# Altium PCB aducm355.PcbDoc
Units mil, origin at the board's own origin, x right, y up, seen from the top; angles counter-clockwise.
Board outline 1195 x 414.11 mil, 2 copper layers (Top Layer, Bottom Layer), stack 12.4 mil thick; 21 components, 24 nets, 164 pads, 27 vias.
Unrouted connection lines stored in the file: 1.
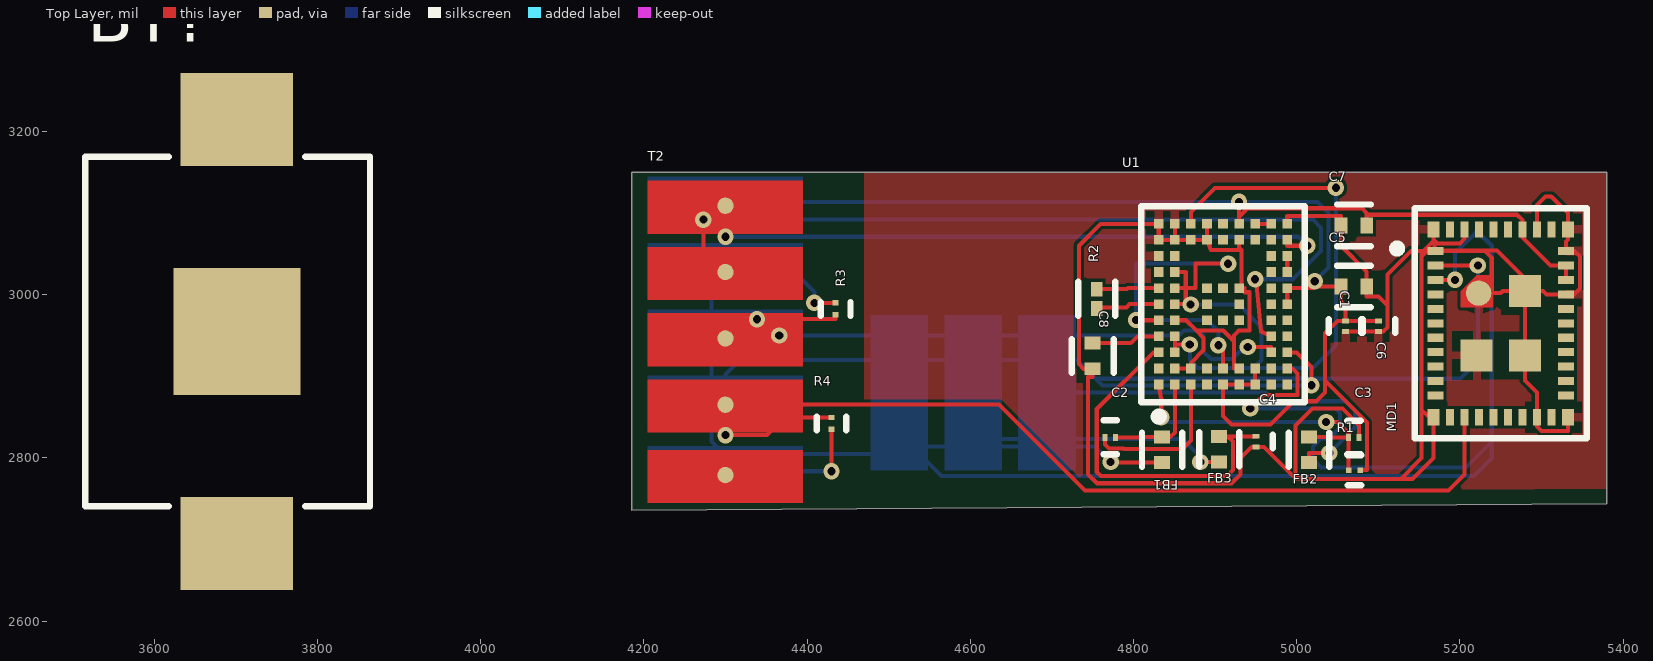
[diagram p0: Top Layer view]
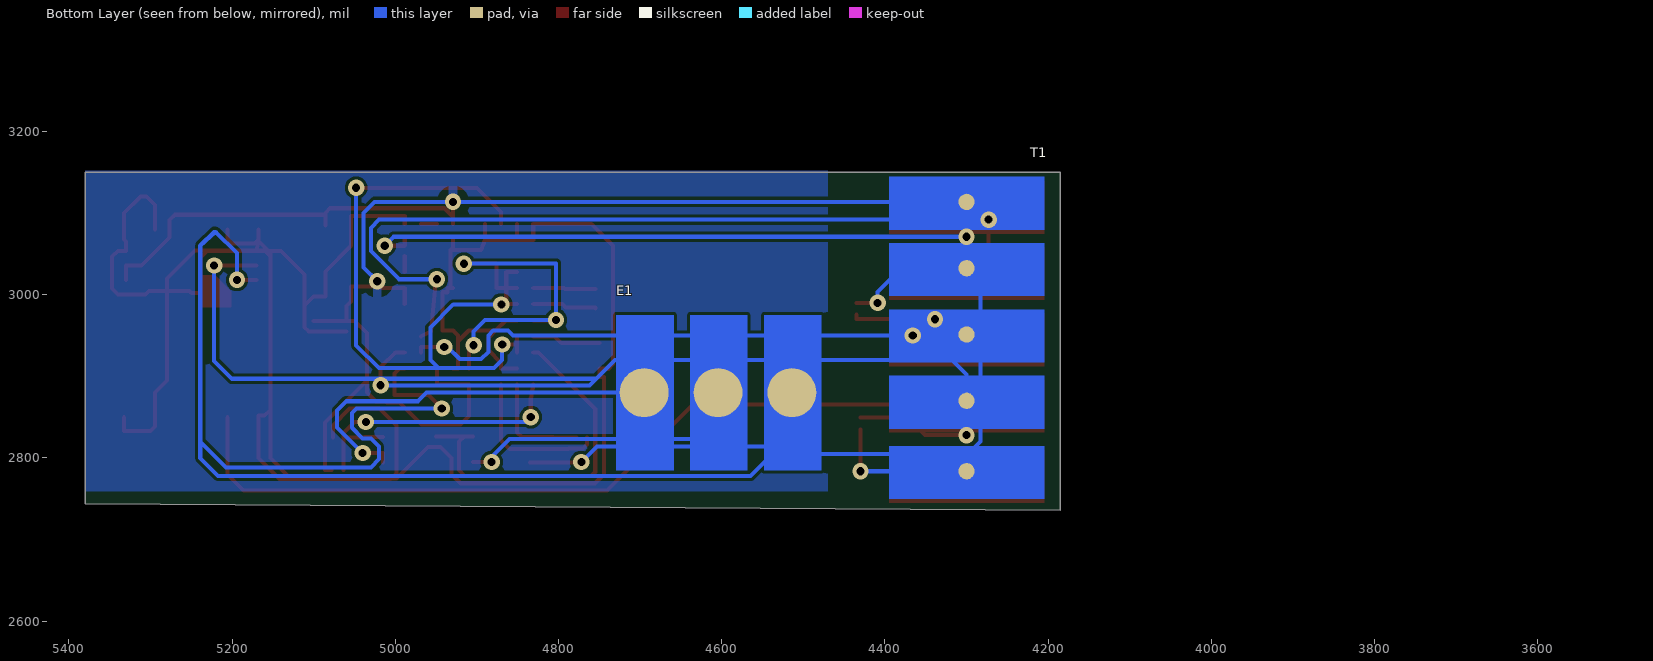
[diagram p1: Bottom Layer view, seen from below]
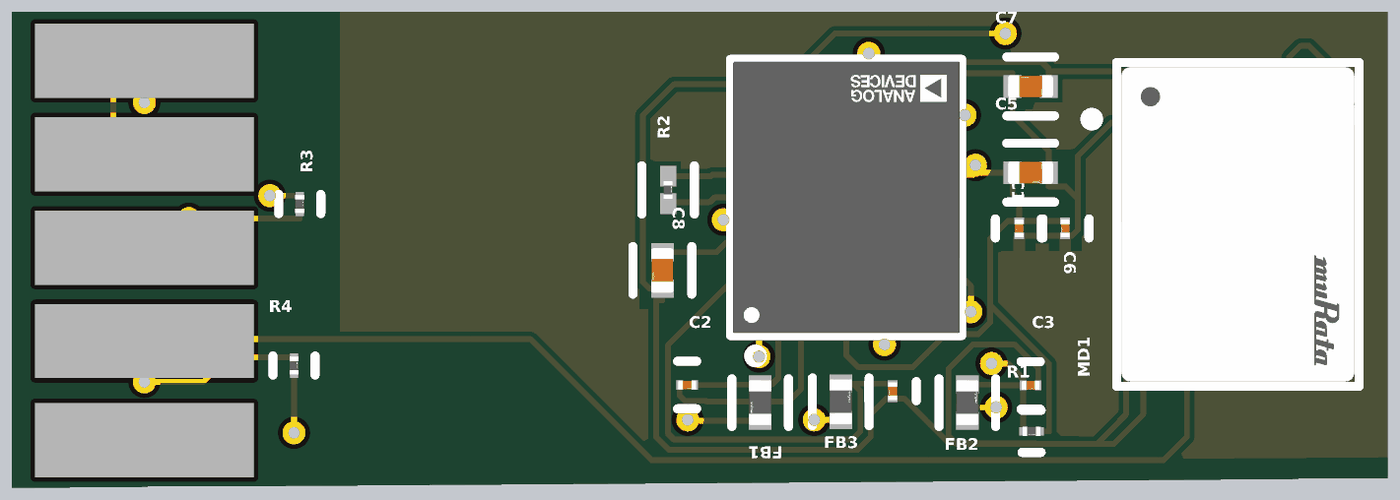
[diagram p2: 3D render of the assembled board from above, using the file's embedded part models]

## Layer stack, top to bottom
Top PI Coverlay: solder mask 0.4724, FC-001, Dk 4
Top Layer: signal copper 1.4
Adhesive 1: prepreg 2.8, PP-006, Dk 4.1
Dielectric 1: core 4, Core-009, Dk 4.5
Adhesive 2: prepreg 2.8, PP-006, Dk 4.1
Bottom Layer: signal copper 1.4
Bottom PI Coverlay: solder mask 0.4724, FC-001, Dk 4

## Board outline
4185,2735.89 4185,3150 5380,3150 5380,2744.08

## Design rules (kind name [scope] priority, off if disabled: settings)
Clearance [All] p1: gap=4 ignorepadtopadclearanceinfootprint=FALSE
FabricationTestpoint "Schematic Fabrication Testpoint Style_3" [InComponent('T1')] p1: side=2 testpointundercomponent=TRUE minsize=40 maxsize=100 preferedsize=60 minholesize=0 maxholesize=40 preferedholesize=32 testpointgrid=1 allowsidebottom=TRUE usegrid=TRUE gridtolerance=0.01
FabricationTestpoint "Schematic Fabrication Testpoint Style_1" [InComponent('T2')] p2: side=2 testpointundercomponent=TRUE minsize=40 maxsize=100 preferedsize=60 minholesize=0 maxholesize=40 preferedholesize=32 testpointgrid=1 allowsidebottom=TRUE usegrid=TRUE gridtolerance=0.01
FabricationTestpoint "Schematic Fabrication Testpoint Style" [InComponent('E1')] p3: side=2 testpointundercomponent=TRUE minsize=40 maxsize=100 preferedsize=60 minholesize=0 maxholesize=40 preferedholesize=32 testpointgrid=1 allowsidebottom=TRUE usegrid=TRUE gridtolerance=0.01
FabricationTestpoint [All] p4: side=3 testpointundercomponent=TRUE minsize=40 maxsize=100 preferedsize=60 minholesize=0 maxholesize=40 preferedholesize=32 testpointgrid=1 allowsidetop=TRUE allowsidebottom=TRUE usegrid=TRUE gridtolerance=0.01
HoleToHoleClearance [All] p1: gap=5 allowstackedmicrovias=TRUE
MinimumSolderMaskSliver [All] p1: minsoldermaskwidth=5
PolygonConnect [All] p1: connectstyle=Relief reliefconductorwidth=10 reliefentries=4 polygonreliefangle="90 Angle" airgapwidth=10
RoutingVias [All] p1: holewidth=10 width=20 viastyle="Through Hole" minholewidth=8 minwidth=16 maxholewidth=28 maxwidth=50
SilkToSilkClearance [All] p1: silktosilkclearance=5
SolderMaskExpansion [All] p1: expansion=4 istentingtop=FALSE
SupplyNets "Schematic Supply Nets" [InNet('GND')] p1: voltage=0.000
Width [All] p1: maxlimit=10 minlimit=5 preferedwidth=5
26 further rules are at their usual default settings.

## Components (designator, comment, footprint, x,y, rotation, side; value= is the part's Value field where it differs from the comment)
BT? "3030" FP-3030-MFG 3690,2955 r270 top
C1 "0.1uf" FP-GRM022-0_02-MFG 5060,2961.5 r270 top
C2 "0.1uf" FP-GRM022-0_02-MFG 4771.5,2825.3 r0 top locked
C3 "30pf" FP-GRM022-0_02-MFG 5070,2825 r0 top locked
C4 "30pf" FP-GRM022-0_02-MFG 4950,2820 r270 top locked
C5 "4.7uf" FP-GRM155-0_1-MFG 5070,3010 r0 top
C6 "0.1uf" FP-GRM022-0_02-MFG 5100,2961.5 r270 top
C7 "4.7uf" FP-GRM155-0_1-MFG 5070,3085 r180 top
C8 "4.7uf" FP-GRM155-0_1-MFG 4750,2925 r270 top
E1 "ElectrodePad" PAD 4604,2880 r270 bottom
FB1 "BLM15AG601SN1D" FP-BLM15-0_05-MFG 4835,2810 r270 top locked
FB2 "BLM15AG601SN1D" FP-BLM15-0_05-MFG 5015,2810 r90 top locked
FB3 "BLM15AG601SN1D" FP-BLM15-0_05-MFG 4905,2810.75 r90 top locked
MD1 "LBEE5KL1DX-883" FP-LBEE5KL1DX-883-MFG 5250,2965 r270 top
R1 "RC0402J104CS" FP-RC0402-MFG 5070.79,2785 r0 top locked
R2 "RC0402J201CS" FP-RC0402-IPC_A 4755,2995 r90 top
R3 "1k" FP-RC0402-MFG 4435,2982.72 r90 top
R4 "1k" FP-RC0402-MFG 4430,2842.28 r90 top
T1 "Programming" PROGRAMMING 4300,2949.75 r180 bottom
T2 "Programming" PROGRAMMING 4300,2945 r0 top
U1 "ADUCM355BCCZ" FP-CC-72-2-MFG 4909.69,2988.43 r90 top

## Footprints (in the part's own frame and the unit in brackets; to place one, negate y for a bottom-side part, rotate by r counter-clockwise, add the part's x,y. Pads: shape width x height; smd on the part's side, far side on the other; paste and mask are expansions set on the pad)
FP-3030-MFG [mm]
  rect 3.96x3.96 smd paste-1000 mask+0: 1(0,0.292)
  rect 2.9x3.5 smd paste+0 mask+0: 2(-6.6,0.292) 2(6.6,0.292)
  silkscreen extent -5.44,-4.43 5.44,4.43, body extent -8.15,-4.53 8.15,4.53, height 0.25
FP-BLM15-0_05-MFG [mm]
  rect 0.4x0.5 smd paste+0 mask+0: 1(-0.4,0) 2(0.4,0)
  silkscreen extent -0.53,-0.62 0.53,0.62, body extent -0.7,-0.38 0.7,0.38, height 0.25
FP-CC-72-2-MFG [mm]
  rect 0.3x0.3 smd paste+0 mask+0: A1(-2.5,2) A2(-2,2) A3(-1.5,2) A4(-1,2) A5(-0.5,2) A6(0,2) A7(0.5,2) A8(1,2) A9(1.5,2) A10(2,2) A11(2.5,2) B1(-2.5,1.5) B2(-2,1.5) B3(-1.5,1.5) B4(-1,1.5) B5(-0.5,1.5) B6(0,1.5) B7(0.5,1.5) B8(1,1.5) B9(1.5,1.5) B10(2,1.5) B11(2.5,1.5) C1(-2.5,1) C2(-2,1) C10(2,1) C11(2.5,1) D1(-2.5,0.5) D2(-2,0.5) D5(-0.5,0.5) D6(0,0.5) D7(0.5,0.5) D10(2,0.5) D11(2.5,0.5) E1(-2.5,0) E2(-2,0) E5(-0.5,0) E7(0.5,0) E10(2,0) E11(2.5,0) F1(-2.5,-0.5) F2(-2,-0.5) F5(-0.5,-0.5) F6(0,-0.5) F7(0.5,-0.5) F10(2,-0.5) F11(2.5,-0.5) G1(-2.5,-1) G2(-2,-1) G10(2,-1) G11(2.5,-1) H1(-2.5,-1.5) H2(-2,-1.5) H3(-1.5,-1.5) H4(-1,-1.5) H5(-0.5,-1.5) H6(0,-1.5) H7(0.5,-1.5) H8(1,-1.5) H9(1.5,-1.5) H10(2,-1.5) H11(2.5,-1.5) J1(-2.5,-2) J2(-2,-2) J3(-1.5,-2) J4(-1,-2) J5(-0.5,-2) J6(0,-2) J7(0.5,-2) J8(1,-2) J9(1.5,-2) J10(2,-2) J11(2.5,-2)
  silkscreen extent -3.62,-2.55 3.05,2.55, body extent -3.55,-3.05 3.55,3.05, height 0.25
FP-GRM022-0_02-MFG [mm]
  rect 0.15x0.215 smd paste+0 mask+0: 1(-0.165,0) 2(0.165,0)
  silkscreen extent -0.21,-0.53 0.21,0.53, body extent -0.34,-0.21 0.34,0.21, height 0.25
FP-GRM155-0_1-MFG [mm]
  rect 0.4x0.5 smd paste+0 mask+0: 1(-0.4,0) 2(0.4,0)
  silkscreen extent -0.53,-0.65 0.53,0.65, body extent -0.7,-0.38 0.7,0.38, height 0.25
FP-LBEE5KL1DX-883-MFG [mm]
  rect 0.25x0.5 smd paste+0 mask+0: 1(-2.25,-2.025) 2(-1.8,-2.025) 3(-1.35,-2.025) 4(-0.9,-2.025) 5(-0.45,-2.025) 6(0,-2.025) 7(0.45,-2.025) 8(0.9,-2.025) 9(1.35,-2.025) 10(1.8,-2.025) 11(2.25,-2.025) 22(2.25,2.025) 23(1.8,2.025) 24(1.35,2.025) 25(0.9,2.025) 26(0.45,2.025) 27(0,2.025) 28(-0.45,2.025) 29(-0.9,2.025) 30(-1.35,2.025) 31(-1.8,2.025) 32(-2.25,2.025)
  rect 0.5x0.375 smd paste+0 mask+0: 12(2.925,-2.088) 21(2.925,2.087) 33(-2.925,2.087) 42(-2.925,-2.088)
  rect 0.5x0.25 smd paste+0 mask+0: 13(2.925,-1.575) 14(2.925,-1.125) 15(2.925,-0.675) 16(2.925,-0.225) 17(2.925,0.225) 18(2.925,0.675) 19(2.925,1.125) 20(2.925,1.575) 34(-2.925,1.575) 35(-2.925,1.125) 36(-2.925,0.675) 37(-2.925,0.225) 38(-2.925,-0.225) 39(-2.925,-0.675) 40(-2.925,-1.125) 41(-2.925,-1.575)
  round 0.787 smd paste+0 mask+0: 43(-0.938,-0.687)
  rect 1x1 smd paste+0 mask+0: 44(1,-0.75) 45(-1,0.75) 46(1,0.75)
  Top Layer region: -0.5,-0.25 -0.5,-1.25 -1,-1.25 -1.5,-0.75 -1.5,-0.25
  silkscreen extent -3.57,-3.35 3.57,2.67, body extent -3.67,-2.78 3.67,2.78, height 0.25
FP-RC0402-IPC_A [mil]
  rect 17.94x14.22 smd paste+0 mask+0: 1(-11.92,0) 2(11.92,0)
  silkscreen extent -21,-23 21,23, body extent -29,-15 29,15, height 10
FP-RC0402-MFG [mm]
  rect 0.17x0.18 smd paste+0 mask+0: 1(-0.185,0) 2(0.185,0)
  silkscreen extent -0.21,-0.47 0.21,0.47, body extent -0.37,-0.21 0.37,0.21, height 0.25
PAD [mil]
  round 60 smd: 1(0,90) 2(0,-0.5) 3(0,-91)
  Top Layer region: -95,126 95,126 95,56 -95,56
  Top Layer region: -95,-55 95,-55 95,-125 -95,-125
  Top Layer region: -95,35.5 95,35.5 95,-34.5 -95,-34.5
PROGRAMMING [mil]
  round 20 smd: 1(0,164) 2(0,82.75) 3(0,1.5) 4(0,-79.75) 5(0,-166)
  Top Layer region: -95,-135.5 95,-135.5 95,-200 -95,-200
  Top Layer region: -95,-49.25 95,-49.25 95,-113.75 -95,-113.75
  Top Layer region: -95,194.5 95,194.5 95,130 -95,130
  Top Layer region: -95,113.25 95,113.25 95,48.75 -95,48.75
  Top Layer region: -95,32 95,32 95,-32.5 -95,-32.5

## Part data
BT?: library part CMP-19636-000028-1, "BATT RETAINER COIN 10MM 1CEL SMD", Case/Package=SMD/SMT, Package Quantity=100, Contact Plating=Tin, Lead Free="Lead Free", Material=Bronze, Mount="Surface Mount", Number of Cells=1, RoHS Compliant=Yes, Series=-, Termination=SMD/SMT
C1 C2 C6: library part CMP-06035-048848-1, "Chip Multilayer Ceramic Capacitors for General Purpose, 01005, 0.10uF, X5R, 15%, 20%, 6.3V", Capacitance=100nF, Case Code (Imperial)=1005, Case/Package=0402, Dielectric=X5R, Max Operating Temperature=85°C, Min Operating Temperature=-55°C, Package Quantity=40000, Tolerance=20%, Voltage Rating=6.3V, Case Code (Metric)=1005, Height=0.2mm, Lead Free="Lead Free", Lead Pitch=0.232inch, Length=0.016inch, Mount="Surface Mount", Packaging="Tape and Reel", Termination=SMD/SMT, Thickness=0.009inch, Voltage Rating (DC)=6.3V, Weight=0.000212oz, Width=0.2mm
C3 C4: library part CMP-06035-005973-1, "Chip Multilayer Ceramic Capacitors for General Purpose, 01005, 30pF, C0G, 30ppm/°C, 5%, 50V", Capacitance=30pF, Dielectric=C0G, Tolerance=5%, Voltage Rating (DC)=50V, Length=400um, Thickness=200um, Width=200um
C5 C7 C8: library part CMP-2008-04549-2, "Chip Multilayer Ceramic Capacitors for General Purpose, 0402, 4.7uF, X5R, 15%, 20%, 6.3V", Capacitance=4.7uF, Case Code (Imperial)=0402, Case Code (Metric)=1005, Dielectric=X5R, Max Operating Temperature=85°C, Min Operating Temperature=-55°C, Package Quantity=10000, Tolerance=20%, Voltage=6.3V, Case/Package=0402, Contact Plating=Tin, Depth=0.5mm, Height=0.5mm, Lead Free="Lead Free", Length=1mm, Mount="Surface Mount", Packaging="Tape and Reel", REACH SVHC="No SVHC", Termination=SMD/SMT, Thickness=0.022inch, Voltage Rating=6.3V, Voltage Rating (DC)=6.3V, Weight=0.000212oz, Width=0.02inch
FB1 FB2 FB3: library part CMP-0686-00187-4, "Chip Ferrite Bead, 0402, 600Ω @ 100MHz, 0.52Ω, 25%, 300mA", Case Code (Imperial)=0402, Case Code (Metric)=1005, Current Rating=300mA, DC Resistance (DCR)=520mR, DC Resistance-Max=600mR, Frequency=100MHz, Max Operating Temperature=125°C, Min Operating Temperature=-55°C, Package Quantity=10000, Tolerance=25%, Case/Package=0402, Core Material=Ferrite, DC Current=300mA, Depth=0.55mm, Height=0.5mm, Impedance=600R, Lead Free="Lead Free", Length=1mm, Material=Steel, Max Current Rating=300mA, Max DC Current=300mA, Military Standard=Not, Number of Circuits=1, Number of Lines=1, Number of Pins=2, Packaging="Tape and Reel", Radiation Hardening=No, REACH SVHC="No SVHC", RoHS Compliant=Yes, Series=BLM15AG_SN, Shielding=Unshielded, Termination=SMD/SMT, Test Frequency=100MHz, Width=0.5mm
MD1: library part CMP-06130-000006-1, "RF TXRX MOD BLUETOOTH/WIFI", Manufacturer=Murata, Max Frequency=2483.5MHz, Max Supply Voltage=4.8V, Min Supply Voltage=1.71V, Nominal Supply Current=25-28mA, Package=0, Receiving Current=47mA, Temperature="-30°C to +70°C", Temperature Range High=+70°C, Temperature Range Low=-30°C, Transmitting Current=260-320mA, Automotive=No, Bandwidth=1MHz, Category=UNK, ComponentLink2Description=Datasheet, ComponentLink2URL=https://content.arduino.cc/assets/Arduino-Portenta-H7_Datasheet_Murata-1dx.pdf, Data Rate=65Mbits/s, Device Class L1="Integrated Circuits (ICs)", Device Class L2="RF Semiconductors and Devices", Device Class L3=Transceivers, Digikey Description="RF TXRX MOD BLUETOOTH/WIFI", Height=1.1mm, Interface=UART,Other, Lead Free=Yes, Manufacturer Part Number=LBEE5KL1DX-883, Octopart=https://octopart.com/lbee5kl1dx-883-murata-74182126, RoHS=TRUE, Sensitivity=-91dBm
R1: library part CMP-13261-004860-1, "Res Thick Film 01005 100kΩ 5% 0.03W ±250ppm/°C Molded SMD T/R", Case Code (Imperial)=1005, Case Code (Metric)=0402, Max Operating Temperature=125°C, Max Power Dissipation=30mW, Min Operating Temperature=-55°C, Package Quantity=1, Resistance=100kR, Temperature Coefficient=250ppm/°C, Tolerance=5%, Voltage Rating (DC)=15V, Composition="Thick Film", Features="Moisture Resistant", Height=0.006inch, Lead Free="Lead Free", Length=0.016inch, Number of Terminations=2, Packaging="Tape and Reel", Width=0.008inch
R2: library part CMP-13261-004485-1, "Res Thick Film 01005 200Ω 5% 0.03W ±250ppm/°C Molded SMD T/R", Case Code (Imperial)=1005, Case Code (Metric)=0402, Max Operating Temperature=125°C, Max Power Dissipation=30mW, Min Operating Temperature=-55°C, Package Quantity=1, Resistance=200R, Temperature Coefficient=250ppm/°C, Tolerance=5%, Voltage Rating (DC)=15V, Composition="Thick Film", Features="Moisture Resistant", Height=0.006inch, Lead Free="Lead Free", Length=0.016inch, Number of Terminations=2, Packaging="Cut Tape", Width=0.008inch
R3 R4: library part CMP-13261-002020-1, "Res Thick Film 01005 1kΩ 5% 0.03W ±250ppm/°C Molded SMD T/R", Case Code (Imperial)=1005, Case Code (Metric)=0402, Max Operating Temperature=125°C, Max Power Dissipation=30mW, Min Operating Temperature=-55°C, Package Quantity=1, Resistance=1kR, Temperature Coefficient=250ppm/°C, Tolerance=5%, Voltage Rating (DC)=15V, Composition="Thick Film", Features="Moisture Resistant", Height=0.006inch, Lead Free="Lead Free", Length=0.016inch, Number of Terminations=2, Packaging="Cut Tape", Width=0.008inch
U1: library part CMP-09090-000013-1, "IC MCU 32BIT 128KB FLASH 72LGA", Number of Pins=72, RoHS Compliant=Yes
E1 T1 T2: Rule="Fabrication Testpoint Style [Under Comp - Allow    Sides - Bottom    Pref Size = 60mil    Pref Hole Size = 32mil    Using Grid = Yes    Grid = 1mil    Grid Tolerance = 0.01mil]"

## Via types
v1: diameter 20, hole 10, Top Layer to Bottom Layer, 27 vias

## Nets (pads, with @x,y where several pads share a name; then routed paths per layer and width w, separated by ;. In a path a pad name is that pad's centre, name@x,y a point inside that pad or via, vN(x,y) a via of type N, cw(c..) or ccw(c..) an arc to the next point about the centre after c; other vN are vias at no path point)
AVDD: C1.1 C5.1 C6.1 C7.1 MD1.30 MD1.31 MD1.36 R1.2 T1.1 U1.E1 U1.F1 U1.F11 U1.G1 U1.G2 U1.J6 U1.J7 | length 2007.6
  Top Layer w5: U1.F11 4929.37,3095.37 ; v1(4929.37,3113.75) 4929.37,3095.37 ; U1.G2 U1.G1 U1.F1 U1.E1 4909.69,2851.31 4920,2841 4968,2841 4995,2868 5010.5,2868 5010.5,2869.5 5024.37,2869.5 5034.87,2880 5034.87,2894.63 ; U1.J6 U1.J7 5020,3008.11 5021.89,3010 v1@5028.5,3010 ; v1(5022,3016.5) v1@5028.5,3010 ; R1.2 5086,2785 5086,2843.5 5034.87,2894.63 ; C7.1 5085.75,3098 ; C6.1 C1.1 ; MD1.30 MD1.31 5310.71,3035.87 5276.57,3070 MD1.36 5276.57,3091.43 5270,3098 5085.75,3098 ; 4929.37,3095.37 4940,3106 5080,3106 5085.75,3100.25 5085.75,3098 ; v1@5028.5,3010 5036,3010 C5.1 5054.25,2991.75 5060,2986 C1.1 ; 5034.87,2894.63 5034.87,2952.86 5050,2967.99 C1.1
  Bottom Layer w5: T1.1 v1(4929.37,3113.75) 5025.25,3113.75 5039,3100 5039,3033.5 v1(5022,3016.5)
BT_ON: MD1.14 T2.4 | length 1027.4
  Top Layer w5: T2.4 4635.25,2865.25 4740.5,2760 5185.71,2760 5205.71,2780 MD1.14
CAP_POT0: C2.1 U1.C1 | length 189.3
  Top Layer w5: C2.1 4765,2816.5 4770,2811.5 4788,2811.5 4788.5,2811 4860,2811 4870.32,2821.32 U1.C1
CE: E1.1 FB1.2 | length 379.9
  Top Layer w5: v1(4772,2795) 4772.75,2794.25 FB1.2
  Bottom Layer w5: E1.1 4514,2840 4540,2814 4753,2814 v1(4772,2795)
CE0: C2.2 FB1.1 U1.B1 | length 133.8
  Top Layer w5: C2.2 4806,2825.3 4806.45,2825.75 FB1.1 4845,2825.75 4850.63,2831.38 U1.B1
GND: C1.2 C3.2 C4.2 C5.2 C6.2 C7.2 C8.2 MD1.1 MD1.12 MD1.19 MD1.21 MD1.29 MD1.32 MD1.33 MD1.35 MD1.40 MD1.42 MD1.43 MD1.44 MD1.45 MD1.46 U1.A9 U1.A10 U1.A11 U1.B2 U1.B5 U1.B10 U1.B11 U1.C2 U1.C10 U1.D10 U1.D11 U1.F2 U1.F7 U1.F10 U1.H2 U1.J11 | length 3399.8
  Top Layer w5: U1.B2 U1.C2 4870.32,2916.32 4886,2932 4886,2947 4877,2956 ; U1.B5 4864.26,2968.74 4877,2956 ; U1.B11 U1.B10 ; U1.D11 U1.D10 ; U1.F2 4923,2909.69 4923,2943 ; U1.F7 U1.F7@4932.5,3008.11 ; U1.F10 4929.37,3058.13 4932.5,3055 4932.5,3054.58 ; U1.J11 4988.43,3096.5 5054.25,3096.5 C7.2 5054.25,3060 5085.75,3028.5 C5.2 5085.75,2998 5100,2998 5111,2987 ; C1.2 C6.2 5106,2955 5111,2960 5111,2987 ; C3.2 5076.5,2840 5056,2860.5 5019.5,2860.5 4998.65,2839.65 4998.65,2780.91 5004.65,2774.91 ; MD1.42 5167.81,3067.46 ; MD1.40 5205.71,3068.71 5200,3063 5172.28,3063 5167.81,3067.46 ; MD1.43 5239,3001.91 ; MD1.35 5294.29,3110 5304.58,3120.29 5311.89,3120.29 5332.18,3100 MD1.33 5332.18,3067.46 5329.72,3065 MD1.32 5340,3053.58 5347,3046.58 5347,3007.43 5340,3000.43 MD1.29 5305.94,3000.43 5302,3004.37 MD1.45 ; MD1.21 5332.18,2833 5300,2833 5294.29,2838.71 MD1.19 5294.29,2880 5279.53,2894.76 MD1.46 MD1.45 ; U1.B10 U1.C10 U1.D10 ; U1.B10 U1.A10 U1.A11 4759.85,3086.85 4733,3060 4733,2915 4738.75,2909.25 C8.2 4750,2899 4744.5,2899 4744.5,2780 4755.5,2769 4920,2769 4931,2780 4931,2800 4944.5,2813.5 C4.2 4960,2813.5 4998.55,2774.96 5004.65,2774.91 ; 4877,2956 4910,2956 4923,2943 ; U1.D10 4895,3054.58 4932.5,3054.58 ; 4923,2943 4923,2950 4929,2956 4942,2956 4942,3003 4936,3003 4936,3008.11 U1.F7@4932.5,3008.11 ; U1.F7@4932.5,3008.11 4932.5,3054.58 ; 5004.65,2774.91 5127.96,2774 ; 5004.65,2774.91 5005.56,2774 5127.96,2774 ; 5111,2987 5111,3024.58 5140,3053.58 5155.4,3053.58 ; 5127.96,2774 5141.81,2774 5167.81,2800 MD1.12 5167.81,2852 5160,2852 5153,2859 ; 5127.96,2774 5153,2800 5153,2859 ; 5153,2859 5153,3047 ; 5153,3047 5159.58,3053.58 ; 5153,3047 5153,3051.19 5155.4,3053.58 ; 5155.4,3053.58 5167.81,3066 ; 5155.4,3053.58 5159.58,3053.58 ; 5159.58,3053.58 5160,3054 MD1.1@5170.19,3054 ; 5159.58,3053.58 MD1.1 ; 5167.81,3066 MD1.1@5170.19,3054 ; 5167.81,3066 5167.81,3067.46 ; MD1.1@5170.19,3054 5245.53,3054 5279.53,3020 MD1.45 ; MD1.1@5170.19,3054 MD1.1 ; MD1.1 5230.42,3053.58 5239,3045 5239,3001.91 ; 5239,3001.91 5250,3001.91 5252.46,3004.37 MD1.45
NetC8_1: C8.1 U1.A4 | length 84.4
  Top Layer w5: C8.1 4796.69,2940.75 4805,2949.06 U1.A4
NetR2_1: R2.1 U1.A6 | length 78.9
  Top Layer w5: R2.1 4755,2984.39 4791.31,2984.39 4795.35,2988.43 U1.A6
NetR2_2: R2.2 U1.A7 | length 76.4
  Top Layer w5: R2.2 4792,3006.92 4793.19,3008.11 U1.A7
NetU1_A5: U1.A5 U1.B7 U1.E2 | length 459.9
  Top Layer w5: v1(4803,2969) 4803,2968.74 U1.A5 ; U1.B7 4876,3008.11 4876,3038 v1(4916,3038) ; v1(4904,2938) 4909.69,2932.31 U1.E2
  Bottom Layer w5: v1(4904,2938) 4904,2955 4890,2969 v1(4803,2969) 4803,3038 v1(4916,3038)
NetU1_B3: U1.B3 U1.B4 U1.B6 U1.B8 U1.C11 | length 874.3
  Top Layer w5: U1.B3 4850.63,2939 ; U1.B4 4850.63,2939 ; U1.B6 v1@4864,2988.43 ; U1.B8 4864,3027.8 v1@4864,2988.43 ; v1(4869,2939) 4850.63,2939 ; v1(4870,2988) 4869.57,2988.43 v1@4864,2988.43 ; U1.C11 4870.32,3101.32 4900,3131 v1(5048,3131)
  Bottom Layer w5: v1(4869,2939) 4869,2920 4879,2910 4947,2910 ; v1(4870,2988) 4929,2988 4957,2960 4957,2920 4947,2910 ; v1(5048,3131) 5048,2938 5020,2910 4947,2910
NetU1_G11: U1.G11 U1.H11 | length 19.7
  Top Layer w5: U1.G11 U1.H11
NetU1_J8: U1.J8 U1.J9 | length 19.7
  Top Layer w5: U1.J8 U1.J9
RE: E1.3 FB2.1 | length 487.4
  Top Layer w5: FB2.1 5015,2806 v1(5040,2806)
  Bottom Layer w5: E1.3 4961.5,2880 4972,2869.5 5060,2869.5 5071.5,2858 5071.5,2837.5 v1(5040,2806)
RE0: C3.1 FB2.2 R1.1 U1.A1 | length 372.2
  Top Layer w5: U1.A1 4834,2873 v1(4834,2850) ; FB2.2 5038,2825.75 5038.75,2825 C3.1 ; v1(5036,2844) 5050,2844 5063.5,2830.5 C3.1 ; R1.1 C3.1
  Bottom Layer w5: v1(4834,2850) 4840,2844 v1(5036,2844)
RESET: T2.1 U1.J10 | length 787.3
  Top Layer w5: v1(4300,3071) T2.1 ; U1.J10 4988.43,3060 v1(5013,3060)
  Bottom Layer w5: v1(4300,3071) 5002,3071 v1(5013,3060)
SE0: C4.1 FB3.2 U1.A3 | length 442.8
  Top Layer w5: U1.A3 4824.37,2929.37 4755,2860 4755,2783 4760,2778 4915,2778 4922,2785 4922,2820 4915.5,2826.5 ; FB3.2 4915.5,2826.5 ; C4.1 4915.5,2826.5
SIN: R3.1 T1.3 | length 148.2
  Top Layer w5: v1(4338.75,2970) 4435,2970 R3.1
  Bottom Layer w5: T1.3 4320,2951.25 v1(4338.75,2970)
SOUT: R4.1 T1.5 | length 181.2
  Top Layer w5: v1(4430,2783.75) R4.1
  Bottom Layer w5: T1.5 v1(4430,2783.75)
SWCLK: T2.3 U1.H3 | length 711.7
  Top Layer w5: T2.3 4362.5,2946.5 v1(4366,2950) ; v1(4940,2936) 4968.74,2936 U1.H3
  Bottom Layer w5: v1(4366,2950) 4856,2950 4862,2956 4880,2956 4886,2950 4886,2930 4895,2921 4921,2921 4936,2936 v1(4940,2936)
SWDIO: T2.2 U1.H4 | length 1048.3
  Top Layer w5: v1(4273,3092) 4273,3040 4285.25,3027.75 T2.2 ; v1(4949,3019) 4949.99,3019 4956,2955 U1.H4
  Bottom Layer w5: v1(4273,3092) 5020,3092 5030,3082 5030,3053.5 4995.5,3019 v1(4949,3019)
UART_SIN: MD1.3 R3.2 T1.2 U1.J2 | length 2308.5
  Top Layer w5: v1(4409,2990) R3.2 ; v1(4943,2860.5) 4959.5,2877 5001,2877 5001,2903.69 4995,2909.69 U1.J2 ; MD1.3 v1(5194,3018.15)
  Bottom Layer w5: v1(4409,2990) 4409,3003.5 4380,3032.5 T1.2 4283,3032.5 4283,2820 4298,2805 4537.8,2805 4564.8,2778 5217,2778 5239,2800 5239,2820 ; v1(4943,2860.5) 5047.5,2860.5 5053,2855 5053,2837 5040,2824 5030,2824 5020,2814 5020,2798.5 5030,2788.5 5207.5,2788.5 5239,2820 ; v1(5194,3018.15) 5194,3051 5220,3077 ; 5220,3077 5239,3060 ; 5220,3077 5222,3077 5239,3060 ; 5239,2820 5239,3060
UART_SOUT: MD1.2 R4.2 T1.4 U1.J3 | length 1656.3
  Top Layer w5: v1(4300,2828) 4351,2828 4372.57,2849.57 R4.2 ; U1.J3 5000,2929.37 5018,2911.37 v1(5018,2889) ; MD1.2 v1(5222,3035.87)
  Bottom Layer w5: v1(4300,2828) T1.4 4300,2902 4318,2920 4731,2920 4754,2897 ; v1(5018,2889) 4762,2889 4754,2897 ; v1(5222,3035.87) 5222,2919 5200,2897 4754,2897
WE: E1.2 FB3.1 | length 363.5
  Top Layer w5: v1(4882,2795) FB3.1
  Bottom Layer w5: E1.2 4604.5,2838.5 4620,2823 4860,2823 4882,2801 v1(4882,2795)
pads on no net: BT?.1 BT?.2 MD1.4 MD1.5 MD1.6 MD1.7 MD1.8 MD1.9 MD1.10 MD1.11 MD1.13 MD1.15 MD1.16 MD1.17 MD1.18 MD1.20 MD1.22 MD1.23 MD1.24 MD1.25 MD1.26 MD1.27 MD1.28 MD1.34 MD1.37 MD1.38 MD1.39 MD1.41 T2.5 U1.A2 U1.A8 U1.B9 U1.D1 U1.D2 U1.D5 U1.D6 U1.D7 U1.E5 U1.E7 U1.E10 U1.E11 U1.F5 U1.F6 U1.G10 U1.H1 U1.H5 U1.H6 U1.H7 U1.H8 U1.H9 U1.H10 U1.J1 U1.J4 U1.J5

## Polygon pours and split planes (outlines as drawn)
no net on Layer0 "Default Coverlay 1 Top" (split plane): 5410,3010 5410.46,3006.77 5412.33,3000.52 5415.37,2994.76 5419.49,2989.7 5424.51,2985.54 5430.24,2982.44 5436.47,2980.52 5442.95,2979.85 5446.21,2980 5590,2980 5590,2930 5446.21,2930 5441.19,2929.75 5431.35,2927.8 5422.07,2923.95 5413.72,2918.38 5410,2915
no net on Layer0 "Default Coverlay 1 Bottom" (split plane): 5410,3010 5410.46,3006.77 5412.33,3000.52 5415.37,2994.76 5419.49,2989.7 5424.51,2985.54 5430.24,2982.44 5436.47,2980.52 5442.95,2979.85 5446.21,2980 5590,2980 5590,2930 5446.21,2930 5441.19,2929.75 5431.35,2927.8 5422.07,2923.95 5413.72,2918.38 5410,2915
AVDD on Bottom Layer "AVDD_L02_P002" (solid, pour order 2): 4470,3151.88 5380,3151.88 5380,2759.28 4470,2759.28
GND on Top Layer "GND_L01_P000" (solid, remove dead copper, pour order 0): 4470,3150 5380,3150 5380,2762.4 4470,2756.16